# Altium PCB PCBtest.PcbDoc
Units mm, origin at the board's own origin, x right, y up, seen from the top; angles counter-clockwise.
Board outline 152.4 x 101.6 mm, 2 copper layers (Top Layer, Bottom Layer); 6 components, 0 nets, 128 pads, 0 vias.
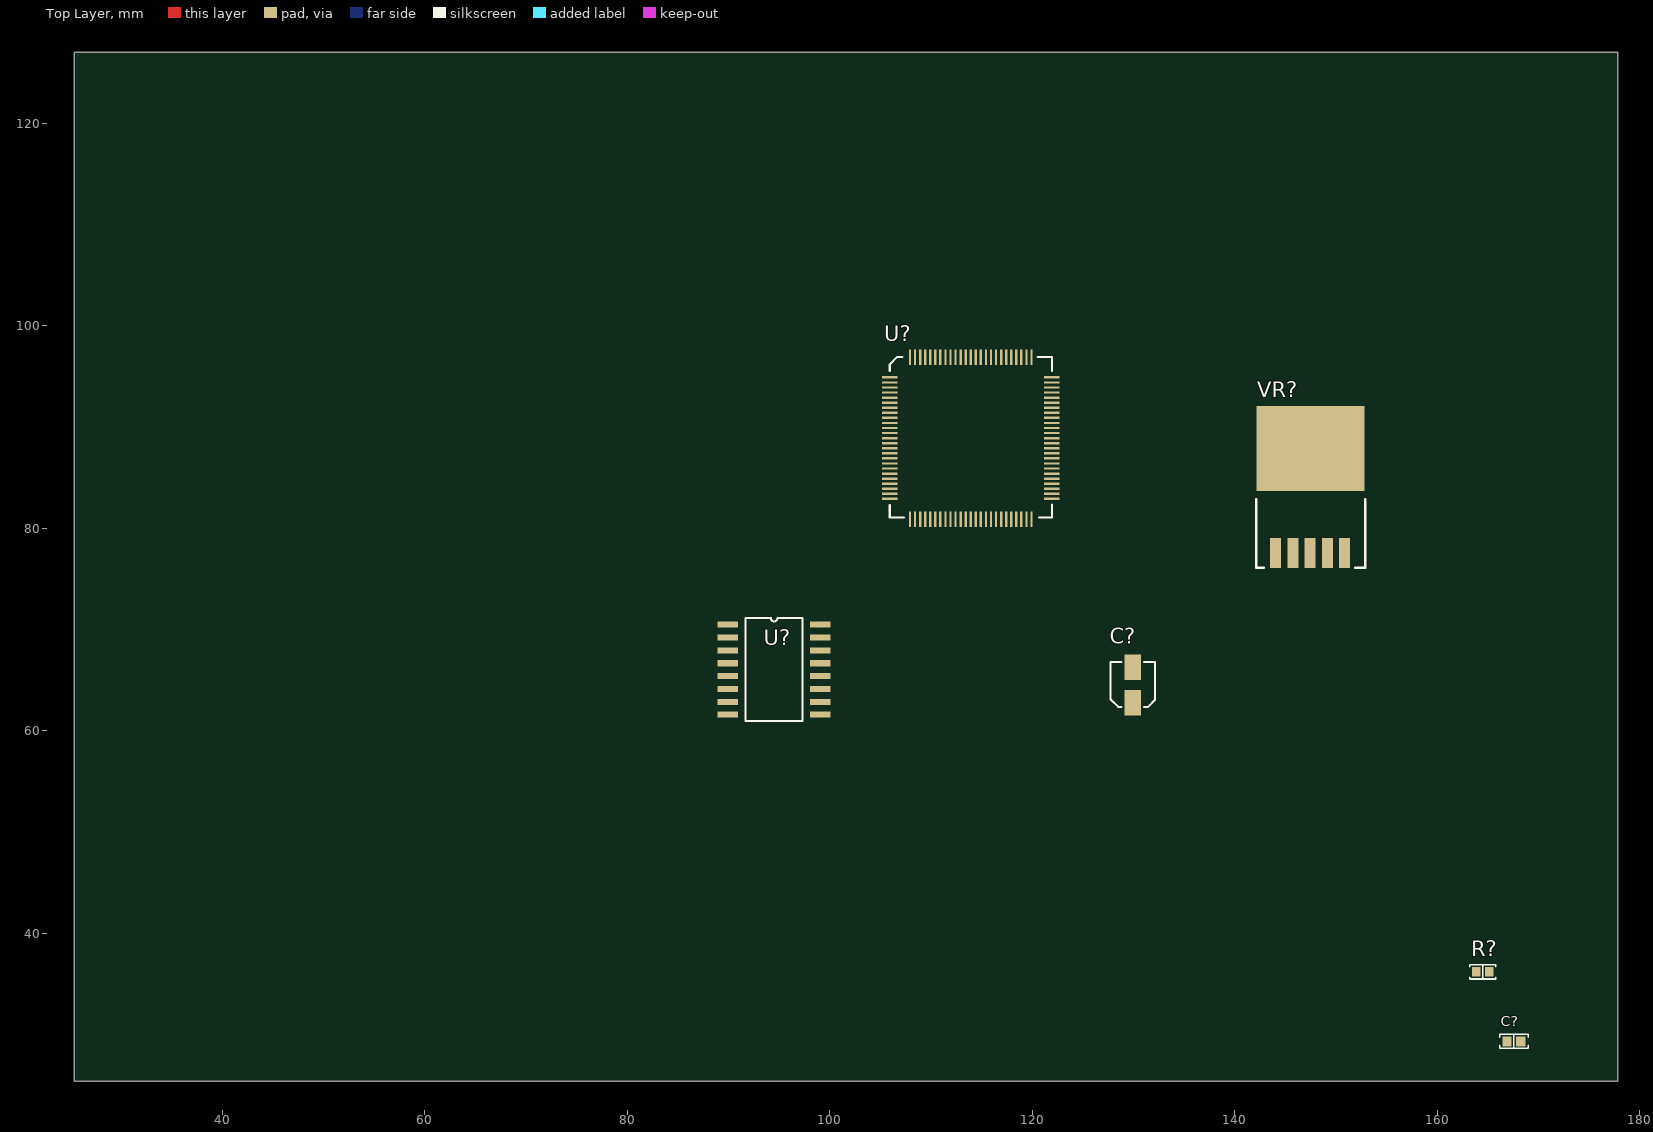
[diagram p0: Top Layer view]
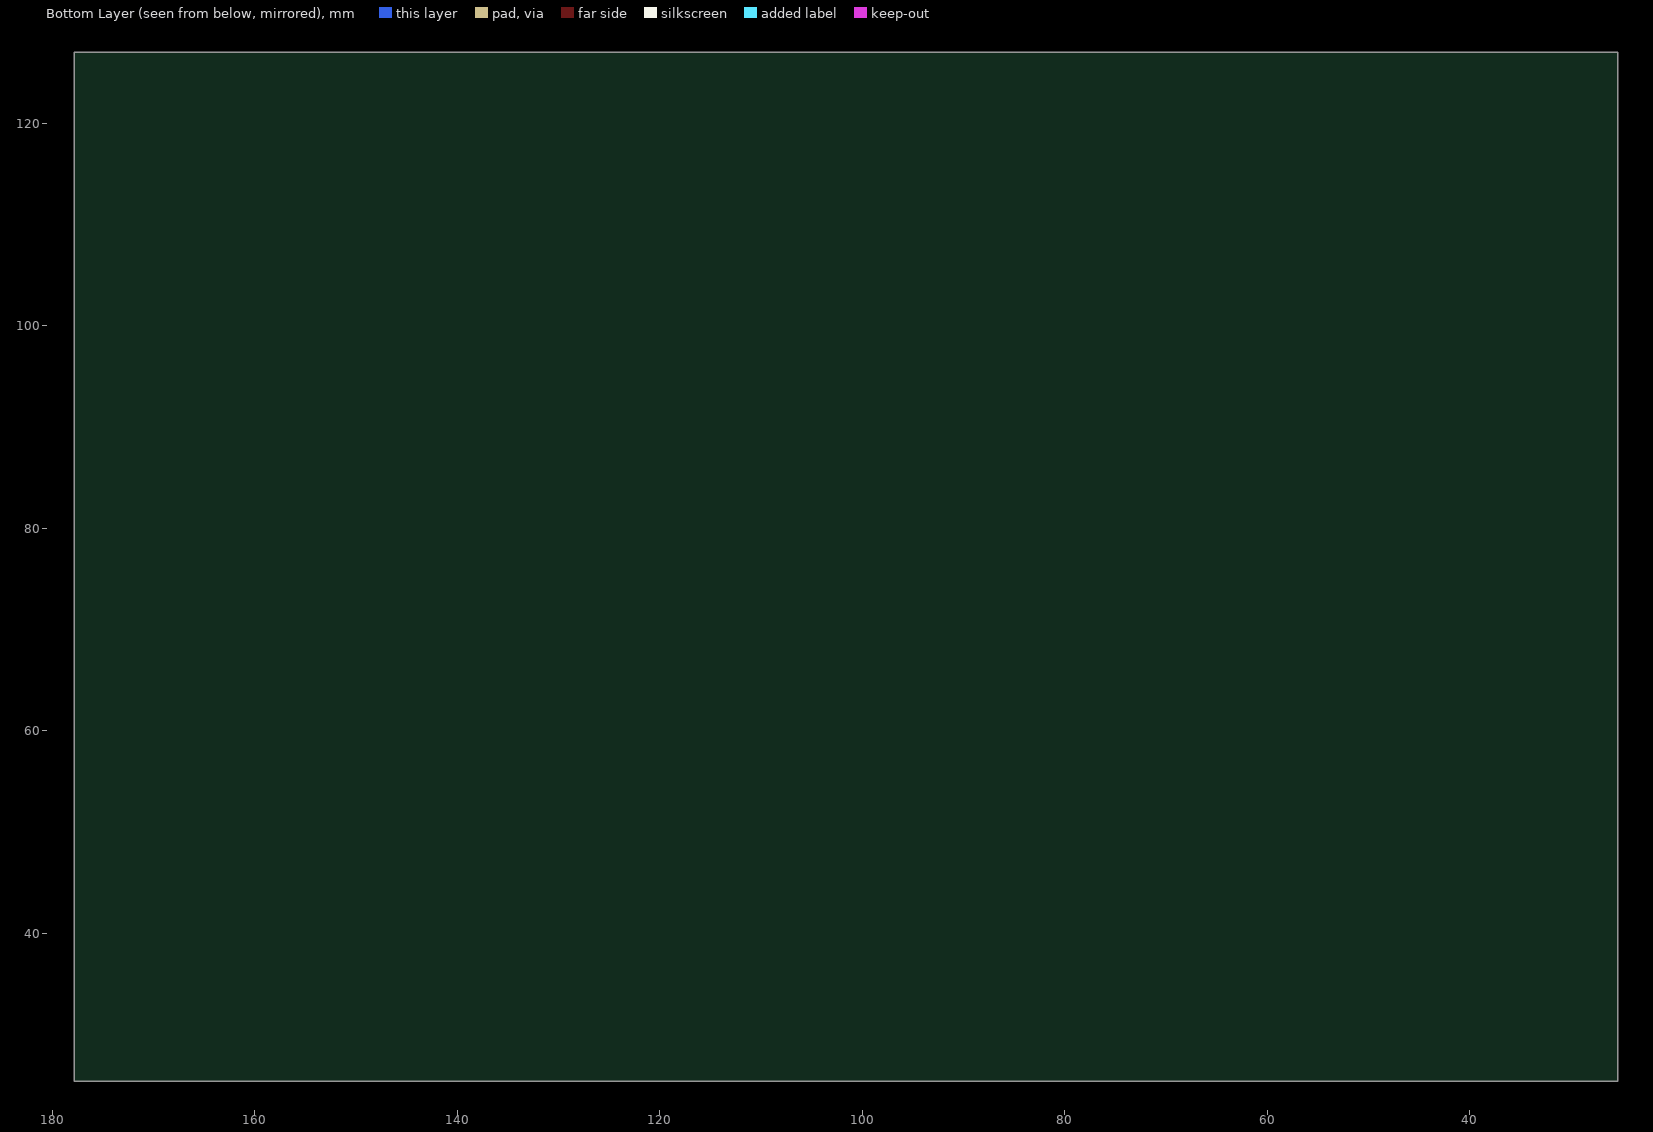
[diagram p1: Bottom Layer view, seen from below]

## Layer stack, top to bottom
Top Solder: solder mask 0.0102, Solder Resist, Dk 3.5
Top Layer: signal copper 0.0356
Dielectric 1: dielectric 0.32, FR-4, Dk 4.8
Bottom Layer: signal copper 0.0356
Bottom Solder: solder mask 0.0102, Solder Resist, Dk 3.5

## Board outline
25.4,25.4 177.8,25.4 177.8,127 25.4,127

## Design rules (kind name [scope] priority, off if disabled: settings)
Clearance [All] p1: gap=0.254 ignorepadtopadclearanceinfootprint=FALSE except(0: Arc-Hole Track-Hole SMDPad-Hole THPad-Hole Via-Hole Fill-Hole Poly-Hole Region-Hole Text-Hole)
MinimumSolderMaskSliver [All] p1: minsoldermaskwidth=0.152
PolygonConnect [All] p1: connectstyle=Relief reliefconductorwidth=0.254 reliefentries=4 polygonreliefangle="90 Angle" airgapwidth=0.254
RoutingVias [All] p1: holewidth=0.711 width=1.27 viastyle="Through Hole" minholewidth=0.711 minwidth=1.27 maxholewidth=0.711 maxwidth=1.27
SilkToSolderMaskClearance [IsPad] p1: minsilkscreentomaskgap=0.127 clearancetoexposedcopper=TRUE
SolderMaskExpansion [All] p1: expansion=0.102 istentingtop=FALSE
Width [All] p1: maxlimit=0.254 minlimit=0.254 preferedwidth=0.254
28 further rules are at their usual default settings.

## Classes and differential pairs
component class 2560TK_Schematic: C? R? U? VR?

## Components (designator, comment, footprint, x,y, rotation, side; value= is the part's Value field where it differs from the comment)
C? "2200pF" "CAP 0603_1608" 167.553,29.337 r0 top
C? "=Value" "CAP ALSMD POLY 4.3MM H5.5MM" 129.921,64.516 r90 top
R? "62 kOhms" "RES 0603_1608" 164.48,36.195 r0 top
U? "ATMEGA2560-16AUR" 100pinTQFP 113.919,88.9 r0 top
U? "SN74HC595NSR" SOIC16 94.488,66.04 r0 top
VR? "LM2596DSADJR4G" "D2PAK 5_LEAD" 147.431,82.724 r90 top

## Footprints (in the part's own frame and the unit in brackets; to place one, negate y for a bottom-side part, rotate by r counter-clockwise, add the part's x,y. Pads: shape width x height; smd on the part's side, far side on the other; paste and mask are expansions set on the pad)
100pinTQFP [mm]
  rect 1.52x0.23 smd mask+0.05: 1(-8,6) 2(-8,5.5) 3(-8,5) 4(-8,4.5) 5(-8,4) 6(-8,3.5) 7(-8,3) 8(-8,2.5) 9(-8,2) 10(-8,1.5) 11(-8,1) 12(-8,0.5) 13(-8,0) 14(-8,-0.5) 15(-8,-1) 16(-8,-1.5) 17(-8,-2) 18(-8,-2.5) 19(-8,-3) 20(-8,-3.5) 21(-8,-4) 22(-8,-4.5) 23(-8,-5) 24(-8,-5.5) 25(-8,-6) 51(8,-6) 52(8,-5.5) 53(8,-5) 54(8,-4.5) 55(8,-4) 56(8,-3.5) 57(8,-3) 58(8,-2.5) 59(8,-2) 60(8,-1.5) 61(8,-1) 62(8,-0.5) 63(8,0) 64(8,0.5) 65(8,1) 66(8,1.5) 67(8,2) 68(8,2.5) 69(8,3) 70(8,3.5) 71(8,4) 72(8,4.5) 73(8,5) 74(8,5.5) 75(8,6)
  rect 0.23x1.52 smd mask+0.05: 26(-6,-8) 27(-5.5,-8) 28(-5,-8) 29(-4.5,-8) 30(-4,-8) 31(-3.5,-8) 32(-3,-8) 33(-2.5,-8) 34(-2,-8) 35(-1.5,-8) 36(-1,-8) 37(-0.5,-8) 38(0,-8) 39(0.5,-8) 40(1,-8) 41(1.5,-8) 42(2,-8) 43(2.5,-8) 44(3,-8) 45(3.5,-8) 46(4,-8) 47(4.5,-8) 48(5,-8) 49(5.5,-8) 50(6,-8) 76(6,8) 77(5.5,8) 78(5,8) 79(4.5,8) 80(4,8) 81(3.5,8) 82(3,8) 83(2.5,8) 84(2,8) 85(1.5,8) 86(1,8) 87(0.5,8) 88(0,8) 89(-0.5,8) 90(-1,8) 91(-1.5,8) 92(-2,8) 93(-2.5,8) 94(-3,8) 95(-3.5,8) 96(-4,8) 97(-4.5,8) 98(-5,8) 99(-5.5,8) 100(-6,8)
  silkscreen extent -8,-7.84 8,8.03, body extent -8,-7.97 8,8.03, height 1.2
"CAP 0603_1608" [mm] "Chip Capacitor, 2-Leads, Body 1.60x0.80mm, IPC Medium Density"
  rect 0.9x1 smd: 1(-0.675,0) 2(0.675,0)
  silkscreen extent -1.4,-0.7 1.4,0.7, body extent -0.8,-0.41 0.8,0.41, height 0.82
"CAP ALSMD POLY 4.3MM H5.5MM" [mm] "Aluminum Polymer Capacitor, Body 4.30x4.30x5.50mm, IPC Low Density"
  rect 2.5x1.6 smd: 1(-1.75,0) 2(1.75,0)
  silkscreen extent -2.17,-2.21 2.3,2.2, body extent -2.3,-2.2 2.3,2.2, height 5.5
"D2PAK 5_LEAD" [mm]
  rect 3x1.1 smd: 1(-5.16,3.404) 2(-5.16,1.702) 3(-5.16,0) 4(-5.16,-1.702) 5(-5.16,-3.404)
  rect 8.38x10.66 smd: BODY(5.16,-0.016)
  silkscreen extent -6.6,-5.46 0.13,5.33, body extent -5.97,-5.08 8.26,5.08, height 4.87
"RES 0603_1608" [mm] "Chip Resistor, 2-Leads, Body 1.60x0.80mm, IPC Medium Density"
  rect 0.85x0.95 smd: 1(-0.65,0) 2(0.65,0)
  silkscreen extent -1.27,-0.7 1.27,0.7, body extent -0.8,-0.4 0.8,0.4, height 0.45
SOIC16 [mm]
  rect 2x0.6 smd: 1(-4.561,4.445) 2(-4.561,3.175) 3(-4.561,1.905) 4(-4.561,0.635) 5(-4.561,-0.635) 6(-4.561,-1.905) 7(-4.561,-3.175) 8(-4.561,-4.445) 9(4.561,-4.445) 10(4.561,-3.175) 11(4.561,-1.905) 12(4.561,-0.635) 13(4.561,0.635) 14(4.561,1.905) 15(4.561,3.175) 16(4.561,4.445)
  silkscreen extent -2.8,-5.08 2.83,5.08, body extent -4.07,-5.27 4.14,5.22, height 2.01

## Part data
C?: library part C0603C222K5HACTU, "CAP CER 2200PF 50V X8R 0603", Part Number=C0603C222K5HACTU
C?: library part EEE-1CA220WAR, "CAP ALUM 22UF 20% 16V SMD", Part Number=EEE-1CA220WAR
R?: library part ERJ-PB3B6202V, "RES SMD 62K OHM 0.1% 1/5W 0603", Part Number=ERJ-PB3B6202V
U?: "ATMEGA2560 IC MCU 8BIT 256KB FLASH 100TQFP", Case/Package=A, Frequency=16MHz, Manufacturer="Microchip / Atmel", Max Operating Temperature=85°C, Max Supply Voltage=5.5V, Min Operating Temperature=-40°C, Min Supply Voltage=4.5V, Operating Supply Voltage=5V, Package Quantity=1500, Supplier Part Number 1=ATMEGA2560-16AURCT-ND, Category=Microcontrollers, ComponentLink1Description=https://datasheet.ciiva.com/6641/atmel-2549-8-bit-avr-microcontroller-atmega640-1280-1281-2560-2561-summary-6641242.pdf?src-supplier=Digi-Key, ComponentLink1URL=https://datasheet.ciiva.com/6641/atmel-2549-8-bit-avr-microcontroller-atmega640-1280-1281-2560-2561-summary-6641242.pdf?src-supplier=Digi-Key, ComponentLink2Description=https://datasheet.ciiva.com/6641/atmel-2549-8-bit-avr-microcontroller-atmega640-1280-1281-2560-2561-summary-6641243.pdf?src-supplier=Digi-Key, ComponentLink2URL=https://datasheet.ciiva.com/6641/atmel-2549-8-bit-avr-microcontroller-atmega640-1280-1281-2560-2561-summary-6641243.pdf?src-supplier=Digi-Key, ComponentLink3Description=https://datasheet.ciiva.com/6641/atmel-2549-8-bit-avr-microcontroller-atmega640-1280-1281-2560-2561-summary-6641244.pdf?src-supplier=Digi-Key, ComponentLink3URL=https://datasheet.ciiva.com/6641/atmel-2549-8-bit-avr-microcontroller-atmega640-1280-1281-2560-2561-summary-6641244.pdf?src-supplier=Digi-Key, Contact Plating=Tin,Matte, Core Architecture=AVR, Data Bus Width=8b, Interface=I2C,SPI,UART,USART,EBI/EMI, Lead Free="Lead Free", Manufacturer Part Number=ATMEGA2560-16AUR, Max Frequency=16MHz, Memory Size=256KB, Memory Type=FLASH, Mount="Surface Mount", Number of I/Os=86, Number of Pins=100, Number of Programmable I/O=86, Number of Timers/Counters=6, Oscillator Type=Internal, Packaging="Tape and Reel", Peripherals="Brown-out Detect/Reset,POR,PWM,WDT", Pricing 1="1=11.99000, 25=10.99000, 100=9.95010 (USD)", RAM Size=8KB, REACH SVHC="No SVHC", RoHS=Yes, Stock 1=900, Supplier 1=Digi-Key, Watchdog Timer=Yes
U?: "Shift Register Single 8-Bit Serial to Serial/Parallel 16-Pin SOP T/R", Case/Package=SOP, Manufacturer="Texas Instruments", Max Operating Temperature=85°C, Max Supply Voltage=6V, Min Operating Temperature=-40°C, Min Supply Voltage=2V, Operating Supply Voltage=5V, Package Quantity=2000, Quiescent Current=8uA, Supplier Part Number 1=296-26485-1-ND, Category="Shift Registers", ComponentLink1Description=https://datasheet.ciiva.com/26807/getdatasheetpartid-39956-26807430.pdf?src-supplier=Verical, ComponentLink1URL=https://datasheet.ciiva.com/26807/getdatasheetpartid-39956-26807430.pdf?src-supplier=Verical, ComponentLink2Description=https://datasheet.ciiva.com/14296/sn74hc595-14296695.pdf?src-supplier=Avnet, ComponentLink2URL=https://datasheet.ciiva.com/14296/sn74hc595-14296695.pdf?src-supplier=Avnet, ComponentLink3Description=https://datasheet.ciiva.com/1886/sn74hc595-1886315.pdf?src-supplier=Digi-Key, ComponentLink3URL=https://datasheet.ciiva.com/1886/sn74hc595-1886315.pdf?src-supplier=Digi-Key, ComponentLink4Description=https://datasheet.ciiva.com/1886/sn74hc595-1886316.pdf?src-supplier=Digi-Key, ComponentLink4URL=https://datasheet.ciiva.com/1886/sn74hc595-1886316.pdf?src-supplier=Digi-Key, ComponentLink5Description=https://datasheet.ciiva.com/1886/sn74hc595-1886317.pdf?src-supplier=Digi-Key, ComponentLink5URL=https://datasheet.ciiva.com/1886/sn74hc595-1886317.pdf?src-supplier=Digi-Key, ComponentLink6Description=https://datasheet.ciiva.com/48704/001074736-da-01-en-ic-shift-regist-sn74hc595nsr-soic-16-tid-48704219.pdf?src-supplier=Conrad, ComponentLink6URL=https://datasheet.ciiva.com/48704/001074736-da-01-en-ic-shift-regist-sn74hc595nsr-soic-16-tid-48704219.pdf?src-supplier=Conrad, Contact Plating=Gold, Direction=Unidirectional, Lead Free="Lead Free", Logic Function="Shift Register", Manufacturer Part Number=SN74HC595NSR, Mount="Surface Mount", Number of Bits=8, Number of Bits per Element=8, Number of Circuits=1, Number of Elements=1, Number of Input Lines=1, Number of Output Lines=9, Number of Pins=16, Output Type=3-STATE, Packaging="Tape and Reel", Pricing 1="1=0.60000, 10=0.51700, 25=0.48240, 100=0.38580, 250=0.35828, 500=0.30316, 1000=0.23426 (USD)", Propagation Delay=34ns, Radiation Hardening=No, REACH SVHC="No SVHC", RoHS=Yes, RoHS Compliant=Yes, Series=74HC, Stock 1=3063, Supplier 1=Digi-Key, Technology=CMOS, Turn-On Delay Time=250ns, Weight=0.007079oz
VR?: "Sw. Regulator 3A Adj. Step-Down D2PAK-5", Case/Package=D2PAK, Manufacturer="ON Semiconductor", Max Input Voltage=40V, Max Operating Temperature=125°C, Max Output Current=3A, Max Output Voltage=37V, Min Input Voltage=4.5V, Min Operating Temperature=-40°C, Min Output Voltage=1.23V, Package Quantity=800, Supplier Part Number 1=LM2596DSADJR4GOSCT-ND, Switching Frequency=150kHz, Category="Voltage Regulators - Switching", ComponentLink1Description=https://datasheet.ciiva.com/15113/getdatasheetpartid-224280-15113862.pdf?src-supplier=Verical, ComponentLink1URL=https://datasheet.ciiva.com/15113/getdatasheetpartid-224280-15113862.pdf?src-supplier=Verical, ComponentLink2Description=https://datasheet.ciiva.com/6603/lm2596-d-6603896.pdf?src-supplier=Digi-Key, ComponentLink2URL=https://datasheet.ciiva.com/6603/lm2596-d-6603896.pdf?src-supplier=Digi-Key, ComponentLink3Description=https://datasheet.ciiva.com/6603/lm2596-d-6603897.pdf?src-supplier=Digi-Key, ComponentLink3URL=https://datasheet.ciiva.com/6603/lm2596-d-6603897.pdf?src-supplier=Digi-Key, ComponentLink4Description=https://datasheet.ciiva.com/6603/lm2596-d-6603898.pdf?src-supplier=Digi-Key, ComponentLink4URL=https://datasheet.ciiva.com/6603/lm2596-d-6603898.pdf?src-supplier=Digi-Key, ComponentLink5Description=https://datasheet.ciiva.com/8270/lm2596-d-8270188.pdf?src-supplier=Avnet, ComponentLink5URL=https://datasheet.ciiva.com/8270/lm2596-d-8270188.pdf?src-supplier=Avnet, Efficiency=73%, Halogen Free="Halogen Free", Height=9.347mm, Lead Free="Lead Free", Length=10.24mm, Manufacturer Part Number=LM2596DSADJR4G, Mount="Surface Mount", Number of Outputs=1, Number of Pins=5, Operating Supply Voltage=40V, Output Current=3A, Output Type=Adjustable, Output Voltage=37V, Packaging="Tape and Reel", Pricing 1="1=2.24000, 10=2.01100, 25=1.89760, 100=1.59390 (USD)", Radiation Hardening=No, REACH SVHC="No SVHC", RoHS=Yes, RoHS Compliant=Yes, Series=LM2596, Stock 1=3215, Supplier 1=Digi-Key, Switching Frequency-Max=150kHz, Synchronous Rectifier=No, Topology=Buck-Boost, Width=4.572mm

## Nets (pads, with @x,y where several pads share a name; then routed paths per layer and width w, separated by ;. In a path a pad name is that pad's centre, name@x,y a point inside that pad or via, vN(x,y) a via of type N, cw(c..) or ccw(c..) an arc to the next point about the centre after c; other vN are vias at no path point)
pads on no net: C?.1 C?.2 R?.1 R?.2 U?.1 U?.2 U?.3 U?.4 U?.5 U?.6 U?.7 U?.8 U?.9 U?.10 U?.11 U?.12 U?.13 U?.14 U?.15 U?.16 U?.17 U?.18 U?.19 U?.20 U?.21 U?.22 U?.23 U?.24 U?.25 U?.26 U?.27 U?.28 U?.29 U?.30 U?.31 U?.32 U?.33 U?.34 U?.35 U?.36 U?.37 U?.38 U?.39 U?.40 U?.41 U?.42 U?.43 U?.44 U?.45 U?.46 U?.47 U?.48 U?.49 U?.50 U?.51 U?.52 U?.53 U?.54 U?.55 U?.56 U?.57 U?.58 U?.59 U?.60 U?.61 U?.62 U?.63 U?.64 U?.65 U?.66 U?.67 U?.68 U?.69 U?.70 U?.71 U?.72 U?.73 U?.74 U?.75 U?.76 U?.77 U?.78 U?.79 U?.80 U?.81 U?.82 U?.83 U?.84 U?.85 U?.86 U?.87 U?.88 U?.89 U?.90 U?.91 U?.92 U?.93 U?.94 U?.95 U?.96 U?.97 U?.98 U?.99 U?.100 VR?.1 VR?.2 VR?.3 VR?.4 VR?.5 VR?.BODY